# EAGLE board Fire Alarm System (EAGLE 7.6.0)

Size 73.58 x 63.39 mm. Coordinates in mm from the lower left corner, seen from the top.
Outline: 0,0 56.82,0 56.82,53.33 0,53.33 0,0
Copper layers (1*16): Top 0.035mm / dielectric 1.5mm / Bottom 0.035mm
Design rules "default": minimum track width 10mil, minimum drill 24mil, track to track 8mil, track to pad 8mil, pad to pad 8mil, via to via 8mil, smd to smd 8mil, copper to edge 40mil, drill to drill 8mil, minimum pad ring 10mil, minimum via ring 8mil, stop-mask expansion 4mil, vias tented up to drill 0mil, thermal gap 10mil

## Footprints (pad centres in the part's own frame; a part is rotated, then mirrored left to right if it is on the bottom)
LED5MM = drill 0.813 octagon: A -1.27,0; K 1.27,0
SNR6-D19.0MM = drill 1.3 pad 2: 1 -3.355,3.355; 2 -3.355,-3.355; 3 3.355,3.355; 4 3.355,-3.355; 5 0,4.75; 6 0,-4.75
1X05 = drill 1 pad 2.184: 1 5.12,0; 2 2.54,0; 3 0,0; 4 -2.54,0; 5 -5.12,0
PIEZO-22MM = drill 1 pad 2.54: P$1 -5,0; P$2 5,0
0207/10 = drill 0.813 octagon: 1 -5.08,0; 2 5.08,0
TL1105 = drill 1 pad 1.676: 1 -2.25,3.25; 2 2.25,3.25; 3 -2.25,-3.25; 4 2.25,-3.25
TO92 = drill 0.813 octagon: 1 1.27,0; 2 0,1.905; 3 -1.27,0
ARDUINO_UNO = drill 1.016 pad 1.88: 0 63.5,50.8; 1 60.96,50.8; 2 58.42,50.8; 3 55.88,50.8; 3.3V 35.56,2.54; 4 53.34,50.8; 5 50.8,50.8; 5V 38.1,2.54; 6 48.26,50.8; 7 45.72,50.8; 8 41.656,50.8; 9 39.116,50.8; 10 36.576,50.8; 11 34.036,50.8; 12 31.496,50.8; 13 28.956,50.8; A0 50.8,2.54; A1 53.34,2.54; A2 55.88,2.54; A3 58.42,2.54; A4 60.96,2.54; A5 63.5,2.54; AREF 23.876,50.8; GND 26.416,50.8; GND. 43.18,2.54; GND.. 40.64,2.54; I/OREF 30.48,2.54; N/C 27.94,2.54; RESET 33.02,2.54; SCL 18.796,50.8; SDA 21.336,50.8; VIN 45.72,2.54 | hole 3.2: 66.04,7.62; 66.04,35.56; 15.24,50.8; 13.97,2.54
1X16P-2.54-2.54-11.6-3.0-BLACK-MALE = drill 0.889 pad 1.651 square: 1 0,19.05 | drill 0.889 pad 1.651: 2 0,16.51; 3 0,13.97; 4 0,11.43; 5 0,8.89; 6 0,6.35; 7 0,3.81; 8 0,1.27; 9 0,-1.27; 10 0,-3.81; 11 0,-6.35; 12 0,-8.89; 13 0,-11.43; 14 0,-13.97; 15 0,-16.51; 16 0,-19.05

## Placement (x,y rotation side)
D1  [LED5MM]  5,86.28 0 top  (outside the outline)
D2  [LED5MM]  5,98.98 0 top  (outside the outline)
D3  [LED5MM]  5,111.68 0 top  (outside the outline)
GAS1  [SNR6-D19.0MM]  5,35.48 0 top
JEWELJEWEL-1  [1X05]  5,264.08 0 top  (outside the outline)
JEWELJEWEL-2  [1X05]  5,251.38 0 top  (outside the outline)
JEWELJEWEL-3  [1X05]  5,238.68 0 top  (outside the outline)
PIEZO1  [PIEZO-22MM]  5,225.98 0 top  (outside the outline)
R1  220‎Ω  [0207/10]  5,48.18 0 top
R2  220‎Ω  [0207/10]  5,60.88 0 top
R3  220‎Ω  [0207/10]  5,73.58 0 top  (outside the outline)
R4  1k‎Ω  [0207/10]  5,137.08 0 top  (outside the outline)
R5  220‎Ω  [0207/10]  5,22.78 0 top
R6  1k‎Ω  [0207/10]  5,162.48 0 top  (outside the outline)
R7  1k‎Ω  [0207/10]  5,200.58 0 top  (outside the outline)
R8  22k‎Ω  [0207/10]  5,213.28 0 top  (outside the outline)
S1  [TL1105]  5,149.78 0 top  (outside the outline)
S2  [TL1105]  5,175.18 0 top  (outside the outline)
S3  [TL1105]  5,187.88 0 top  (outside the outline)
U1  [TO92]  5,276.78 0 top  (outside the outline)
U5  [ARDUINO_UNO]  5,10.08 0 top
U6  [1X16P-2.54-2.54-11.6-3.0-BLACK-MALE]  5,124.38 0 top  (outside the outline)

## Library data of the parts
D1-D3 GAS1 JEWELJEWEL-1-JEWELJEWEL-3 PIEZO1 R1-R8 S1-S3 U1 U5 U6 = AUTODESK_CIRCUITS_BREADBOARD

## Nets
N$1: U5.12 U6.4
N$2: U5.11 U6.6
N$3: U5.5 U6.11
N$4: U5.4 U6.12
N$5: U5.3 U6.13
N$6: U5.2 U6.14
N$7: R4.1 U6.3
N$8: D1.K R2.1
N$9: D3.K R1.1
N$10: D3.A U5.10
N$11: D1.A U5.9
N$12: S1.2
N$13: S1.1
N$14: R6.2 S1.3 U5.A5
N$15: R5.1 U6.15
N$16: R7.2 S2.3 U5.A4
N$17: D2.K R3.1
N$18: D2.A U5.8
N$19: PIEZO1.P$1 U5.6
N$20: GAS1.2 GAS1.4 R8.2 U5.A2
N$21: JEWELJEWEL-1.4 JEWELJEWEL-2.4 JEWELJEWEL-3.4 U5.GND
N$22: JEWELJEWEL-1.1 U5.13
N$23: JEWELJEWEL-2.1 U5.7
N$24: JEWELJEWEL-3.1 U5.A0
N$25: JEWELJEWEL-1.3
N$26: S2.2
N$27: S2.1
N$28: S3.2
N$29: S3.1
N$30: S3.3 U5.RESET
N$31: GAS1.6 PIEZO1.P$2 R1.2 R2.2 R3.2 R4.2 R6.1 R7.1 R8.1 S3.4 U1.1 U5.GND.. U6.1 U6.5 U6.16
N$32: GAS1.1 GAS1.3 GAS1.5 JEWELJEWEL-1.2 JEWELJEWEL-2.2 JEWELJEWEL-3.2 R5.2 S1.4 S2.4 U1.3 U5.5V U6.2
N$33: U1.2 U5.A1

## Tracks (layer width: path | path; a pad name or v marks a point on that pad's centre or on a via)
N$1  (1 unrouted)
N$2  (1 unrouted)
N$3  (1 unrouted)
N$4  (1 unrouted)
N$5  (1 unrouted)
N$6  (1 unrouted)
N$7  (1 unrouted)
N$8  (1 unrouted)
N$9  (1 unrouted)
N$10  (1 unrouted)
N$11  (1 unrouted)
N$14  (2 unrouted)
N$15  (1 unrouted)
N$16  (2 unrouted)
N$17  (1 unrouted)
N$18  (1 unrouted)
N$19  (1 unrouted)
N$20  (3 unrouted)
N$21  (3 unrouted)
N$22  (1 unrouted)
N$23  (1 unrouted)
N$24  (1 unrouted)
N$30  (1 unrouted)
N$31  (14 unrouted)
N$32  (11 unrouted)
N$33  (1 unrouted)